# Altium PCB stepper_driver.PcbDoc
Units mm, origin at the board's own origin, x right, y up, seen from the top; angles counter-clockwise.
Board outline 57 x 45 mm, 2 copper layers (Top Layer, Bottom Layer), stack 1.571 mm thick; 62 components, 43 nets, 177 pads, 16 vias.
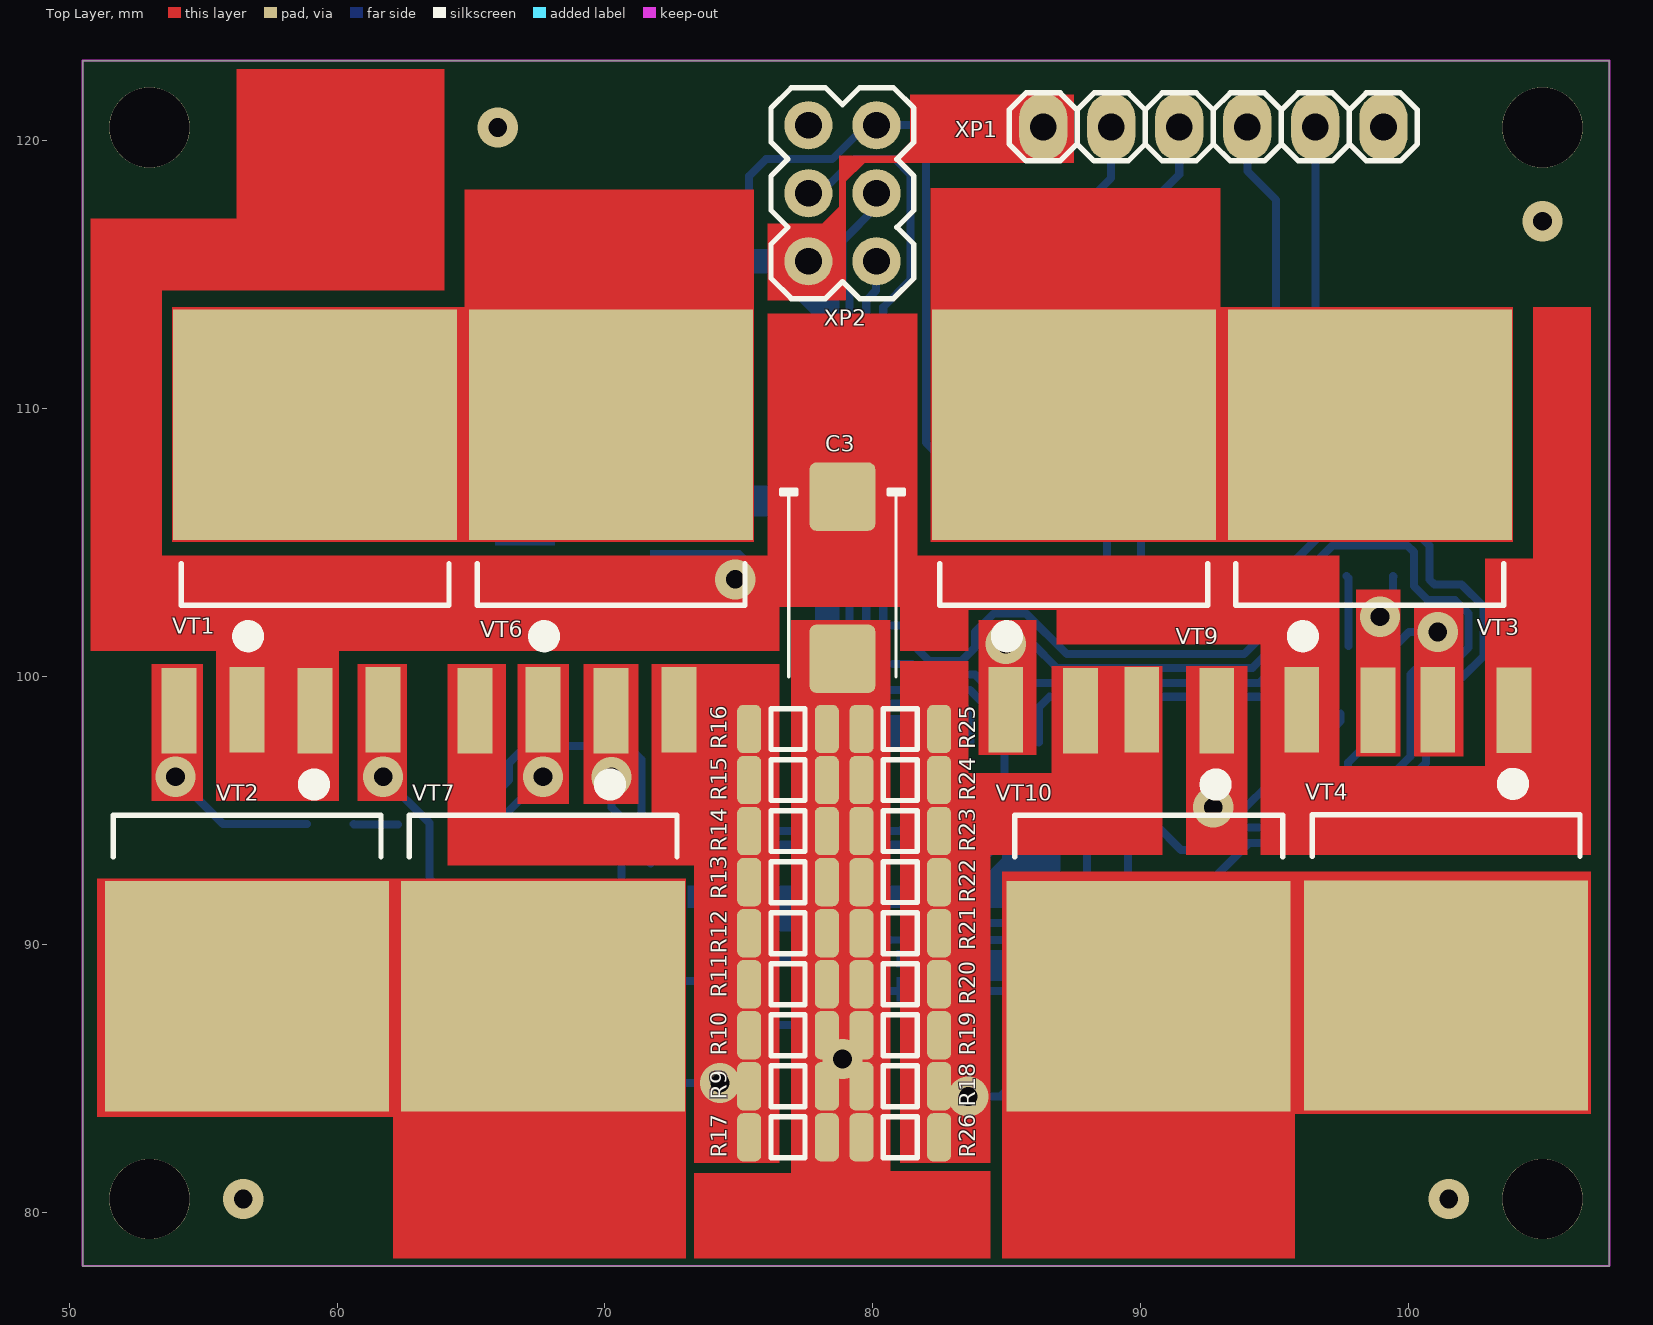
[diagram p0: Top Layer view]
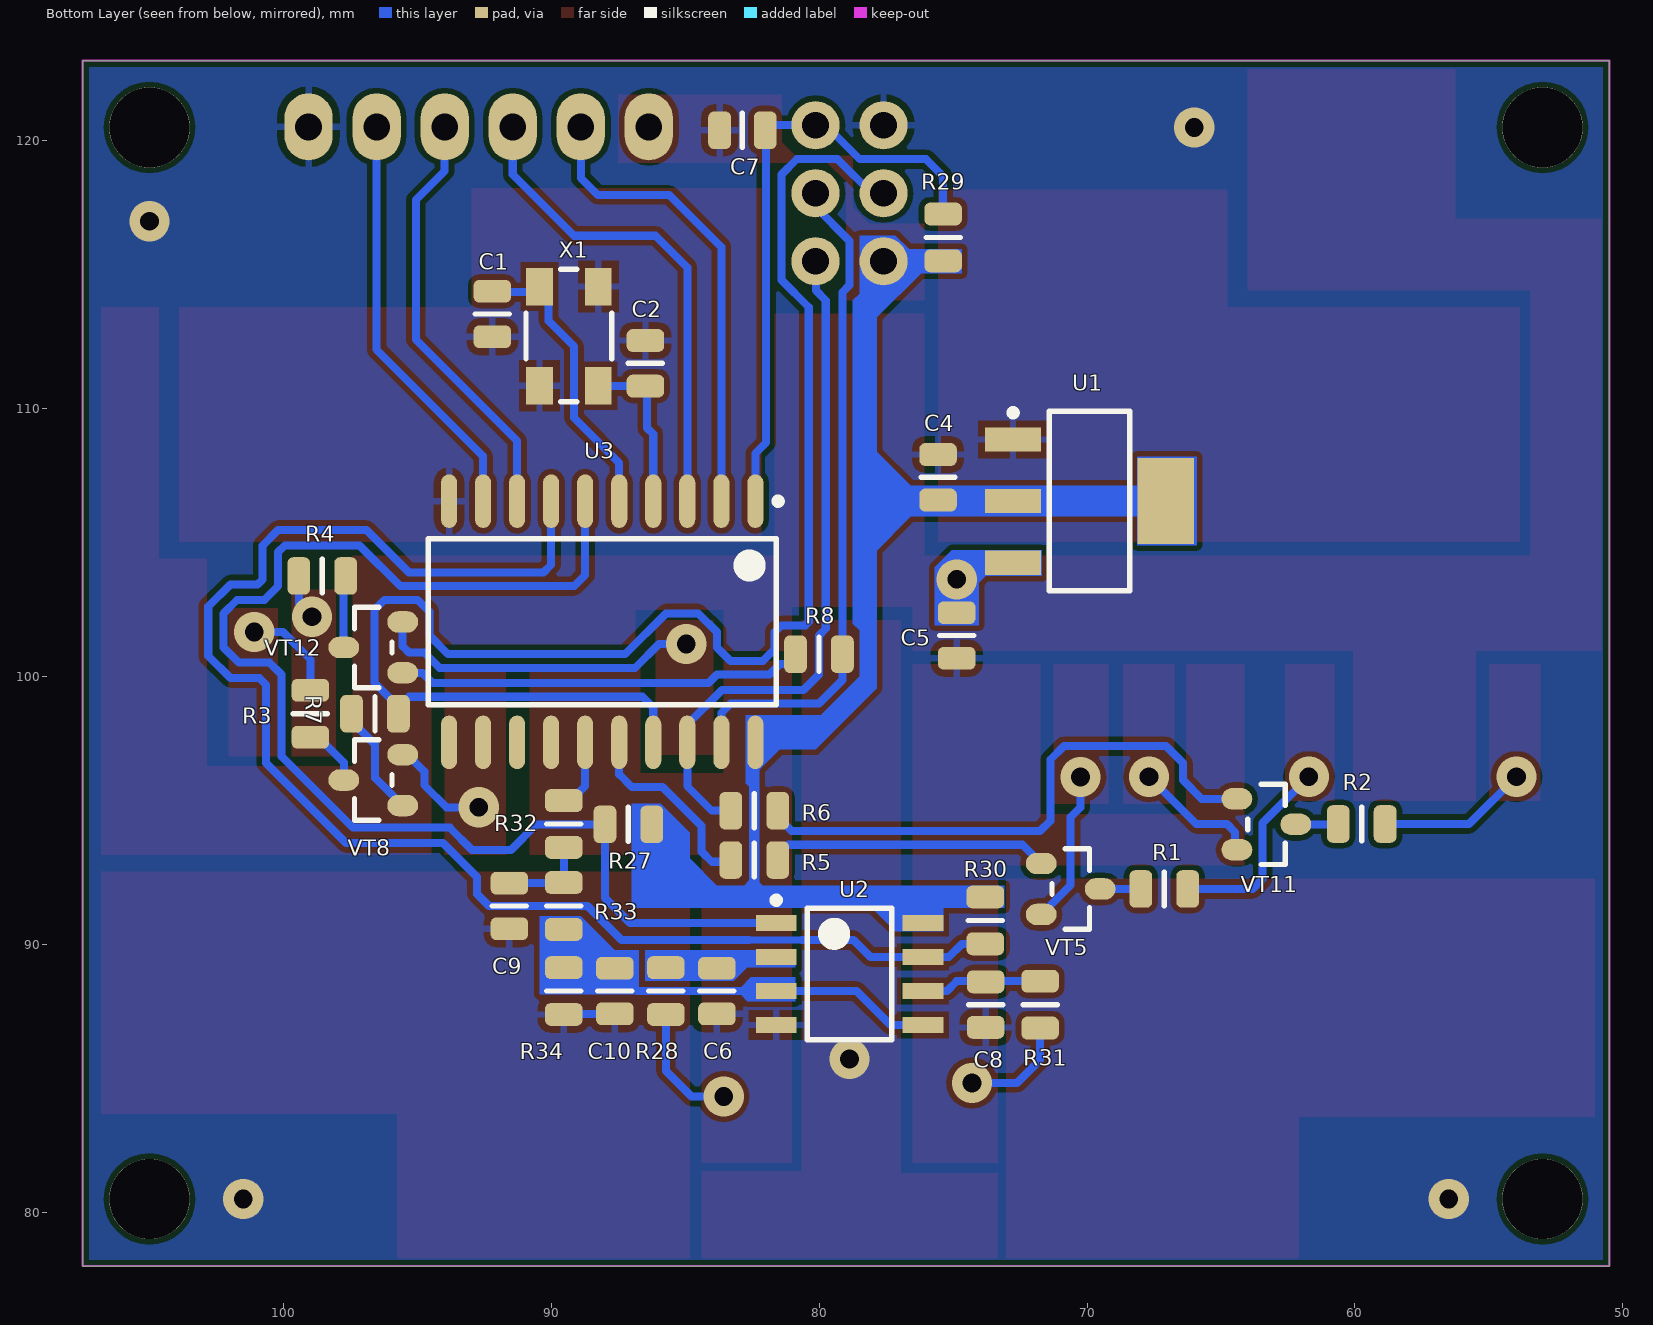
[diagram p1: Bottom Layer view, seen from below]
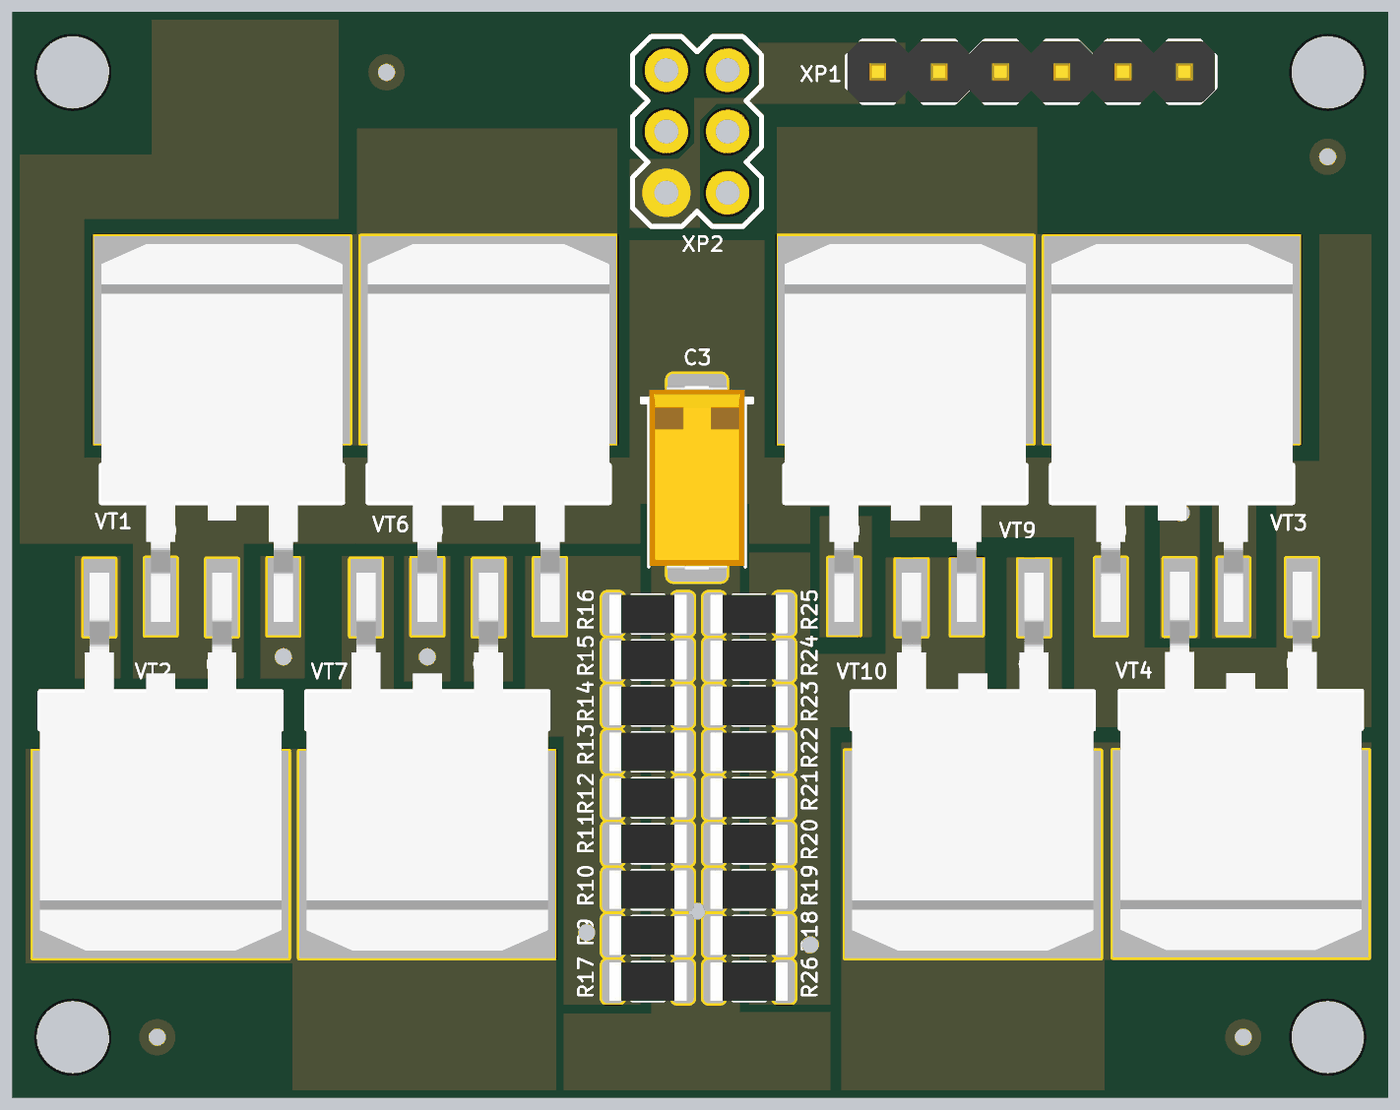
[diagram p2: 3D render of the assembled board from above, using the file's embedded part models]
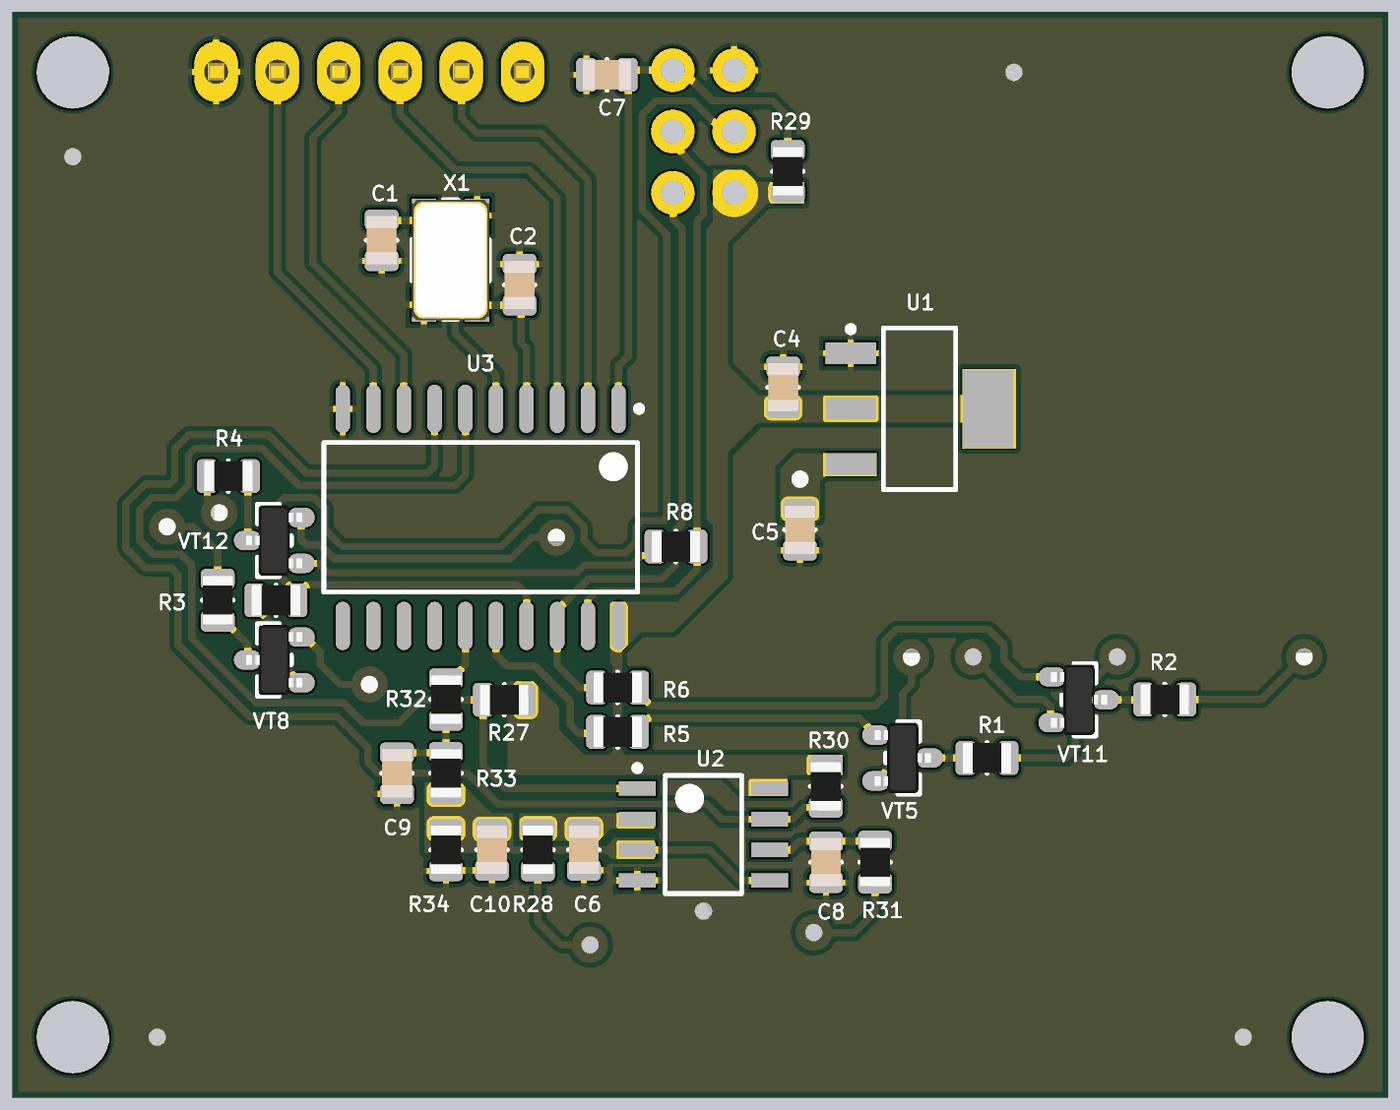
[diagram p3: 3D render of the assembled board from below, using the file's embedded part models]

## Layer stack, top to bottom
Top Solder: solder mask 0.0102, Solder Resist, Dk 3.5
Top Layer: signal copper 0.0356
Dielectric 1: dielectric 1.5, FR-4, Dk 4.8
Bottom Layer: signal copper 0.0356
Bottom Solder: solder mask 0.0102, Solder Resist, Dk 3.5

## Board outline
50.5,78 50.5,123 107.5,123 107.5,78

## Design rules (kind name [scope] priority, off if disabled: settings)
Clearance [All] p1: gap=0.2
PolygonConnect PolygonConnect_1 [IsVia] p1: connectstyle=Direct reliefconductorwidth=0.254 reliefentries=4 polygonreliefangle="90 Angle" airgapwidth=0.254
PolygonConnect [All] p2: connectstyle=Relief reliefconductorwidth=0.254 reliefentries=4 polygonreliefangle="90 Angle" airgapwidth=0.254
RoutingVias [All] p1: holewidth=0.7 width=1.5 viastyle="Through Hole" minholewidth=0.5 minwidth=0.8 maxholewidth=1 maxwidth=2
SolderMaskExpansion [All] p1: expansion=0.102
Width [All] p1: maxlimit=2 minlimit=0.2 preferedwidth=0.254
29 further rules are at their usual default settings.

## Components (designator, comment, footprint, x,y, rotation, side; value= is the part's Value field where it differs from the comment)
C1 "22pF" CAP0805R 92.202,113.538 r90 bottom
C2 "22pF" CAP0805R 86.487,111.697 r270 bottom
C3 "330uF" TAN_D 78.867,103.695 r270 top
C4 "22uF" CAP0805R 75.565,107.442 r270 bottom
C5 "22uF" CAP0805R 74.867,101.536 r90 bottom
C6 "100nF" CAP0805R 83.82,88.265 r90 bottom
C7 "100nF" CAP0805R 82.867,120.396 r180 bottom
C8 "100nF" CAP0805R 73.787,87.757 r90 bottom
C9 "100nF" CAP0805R 91.567,91.44 r90 bottom
C10 "100nF" CAP0805R 87.63,88.265 r90 bottom
R1 "1k" RES0805R 67.12,92.075 r180 bottom
R2 "1k" RES0805R 59.75,94.5 r0 bottom
R3 "1k" RES0805R 98.996,98.615 r90 bottom
R4 "1k" RES0805R 98.552,103.759 r180 bottom
R5 "1k" RES0805R 82.423,93.154 r180 bottom
R6 "1k" RES0805R 82.423,94.996 r0 bottom
R7 "1k" RES0805R 96.584,98.615 r0 bottom
R8 "1k" RES0805R 80.01,100.838 r180 bottom
R9 "1" RES1206R 76.835,84.709 r180 top
R10 "1" RES1206R 76.835,86.614 r180 top
R11 "1" RES1206R 76.835,88.519 r180 top
R12 "1" RES1206R 76.835,90.424 r180 top
R13 "1" RES1206R 76.835,92.329 r180 top
R14 "1" RES1206R 76.835,94.234 r180 top
R15 "1" RES1206R 76.835,96.139 r180 top
R16 "1" RES1206R 76.835,98.044 r180 top
R17 "1" RES1206R 76.835,82.804 r180 top
R18 "1" RES1206R 81.026,84.709 r0 top
R19 "1" RES1206R 81.026,86.614 r0 top
R20 "1" RES1206R 81.026,88.519 r0 top
R21 "1" RES1206R 81.026,90.424 r0 top
R22 "1" RES1206R 81.026,92.329 r0 top
R23 "1" RES1206R 81.026,94.234 r0 top
R24 "1" RES1206R 81.026,96.139 r0 top
R25 "1" RES1206R 81.026,98.044 r0 top
R26 "1" RES1206R 81.026,82.804 r0 top
R27 "4k7" RES0805R 87.122,94.488 r180 bottom
R28 "10k" RES0805R 85.725,88.265 r90 bottom
R29 "10k" RES0805R 75.374,116.395 r90 bottom
R30 "4k7" RES0805R 73.8,90.9 r90 bottom
R31 "10k" RES0805R 71.755,87.757 r90 bottom
R32 "36k" RES0805R 89.535,94.5 r270 bottom
R33 "51k" RES0805R 89.535,91.44 r270 bottom
R34 "10k" RES0805R 89.535,88.265 r90 bottom
U1 "LM1117IMP-5.0" MP04A_L 69.913,106.553 r180 bottom
U2 "LM393DG" ONSC-SOIC-8-751-07_V 78.867,88.9 r180 bottom
U3 "ATtiny2313-20SU" 20S_L 88.1,102.05 r270 bottom
VT1 "KT837A" D2PAK 59.182,105.41 r90 top
VT2 "KT837A" D2PAK 56.642,92.075 r270 top
VT3 "KT837A" D2PAK 98.552,105.41 r90 top
VT4 "KT837A" D2PAK 101.4,92.1 r270 top
VT5 "BC847C" SOT23 70.612,92.075 r180 bottom
VT6 "KT829A" D2PAK 70.231,105.41 r90 top
VT7 "KT829A" D2PAK 67.691,92.075 r270 top
VT8 "BC847C" SOT23 96.647,96.139 r0 bottom
VT9 "KT829A" D2PAK 87.503,105.41 r90 top
VT10 "KT829A" D2PAK 90.297,92.075 r270 top
VT11 "BC847C" SOT23 63.309,94.488 r180 bottom
VT12 "BC847C" SOT23 96.647,101.092 r0 bottom
X1 "10MHz" 5032 89.344,112.712 r270 bottom
XP1 "PLS" PLS-06 92.71,120.523 r0 top
XP2 "PLD" PLD-06 78.867,118.046 r90 top

## Footprints (in the part's own frame and the unit in brackets; to place one, negate y for a bottom-side part, rotate by r counter-clockwise, add the part's x,y. Pads: shape width x height; smd on the part's side, far side on the other; paste and mask are expansions set on the pad)
20S_L [mm] "SOIC, 20-Leads, Body 12.8x7.5mm, Pitch 1.27mm, IPC High Density"
  oval 2x0.6 smd: 1(-4.5,5.715) 2(-4.5,4.445) 3(-4.5,3.175) 4(-4.5,1.905) 5(-4.5,0.635) 6(-4.5,-0.635) 7(-4.5,-1.905) 8(-4.5,-3.175) 9(-4.5,-4.445) 10(-4.5,-5.715) 11(4.5,-5.715) 12(4.5,-4.445) 13(4.5,-3.175) 14(4.5,-1.905) 15(4.5,-0.635) 16(4.5,0.635) 17(4.5,1.905) 18(4.5,3.175) 19(4.5,4.445) 20(4.5,5.715)
  silkscreen extent -4.62,-6.5 3.1,6.69, body extent -3.8,-6.5 3.8,6.5, height 2.65
5032 [mm]
  rect 1.4x1 smd: 1(-1.85,-1.1) 2(1.85,-1.1) 3(1.85,1.1) 4(-1.85,1.1)
  silkscreen extent -2.5,-1.6 2.45,1.6, body extent -2.5,-1.6 2.5,1.6, height 1.01
CAP0805R [mm] "capacitor 0805 reflow soldering"
  rrect50% 0.85x1.4 smd: 1(-0.85,0) 2(0.85,0)
  silkscreen extent 0,-0.64 0,0.64, body extent -1,-0.62 1,0.63, height 0.61
D2PAK [mm] "D2-PAK, 4-Leads, Body 8.8x10.4mm, Pitch 2.54mm, Lead Span 15.1mm, IPC High Density"
  rect 3.2x1.3 smd: 1(-6.65,2.54) 2(-6.65,-2.54)
  rect 8.6x10.6 smd: 3(4,0)
  silkscreen extent -4.2,-5 -1.2,5, body extent -7.69,-5 7.98,5, height 4.81
MP04A_L [mm] "SOT223, 4-Leads, Body 6.5x3.5mm, Pitch 2.3mm, Lead Span 7mm, IPC High Density"
  rect 2.1x0.9 smd: 1(-2.85,2.3) 2(-2.85,0) 3(-2.85,-2.3)
  rect 2.1x3.2 smd: 4(2.85,0)
  silkscreen extent -2.98,-3.35 1.5,3.42, body extent -1.86,-3.35 1.86,3.35, height 1.8
ONSC-SOIC-8-751-07_V [mm] "SOIC, 8-Leads, Body 4.9x3.9mm, Pitch 1.27mm"
  rect 1.52x0.6 smd: 1(-2.74,1.905) 2(-2.74,0.635) 3(-2.74,-0.635) 4(-2.74,-1.905) 5(2.74,-1.905) 6(2.74,-0.635) 7(2.74,0.635) 8(2.74,1.905)
  silkscreen extent -2.87,-2.45 1.58,2.88, body extent -1.95,-2.45 1.95,2.45, height 1.75
PLD-06 [mm]
  round 1.8 hole 1: 1(-2.54,-1.27) 2(-2.54,1.27) 3(0,-1.27) 4(0,1.27) 5(2.54,-1.27) 6(2.54,1.27)
  silkscreen extent -3.94,-2.67 3.94,2.67
PLS-06 [mm]
  oval 1.8x2.5 hole 1: 1(-6.35,0) 2(-3.81,0) 3(-1.27,0) 4(1.27,0) 5(3.81,0) 6(6.35,0)
  silkscreen extent -7.62,-1.27 7.62,1.27, body extent -7.62,-1.27 7.62,1.27, height 8.45
RES0805R [mm] "resistor 0805 reflow soldering"
  rrect50% 0.85x1.4 smd: 1(-0.875,0) 2(0.875,0)
  silkscreen extent 0,-0.64 0,0.64, body extent -1,-0.62 1,0.63, height 0.61
RES1206R [mm] "resistor 1206 reflow soldering"
  rrect50% 0.9x1.8 smd: 1(-1.45,0) 2(1.45,0)
  silkscreen extent -0.64,-0.76 0.63,0.76, body extent -1.6,-0.8 1.6,0.8, height 0.61
SOT23 [mm]
  oval 1.15x0.8 smd mask+0.1: 1(-1.1,0.95) 2(-1.1,-0.95) 3(1.1,0)
  silkscreen extent -0.7,-1.5 0.7,1.5, body extent -1.16,-1.46 1.18,1.46, height 1
TAN_D [mm] "Molded body capacitor, Body 7.3x4.3mm, 2917, IPC Nominal settings"
  round 1 on Mech15: 0(0,0)
  rrect20% 2.55x2.45 smd: 1(-3.025,0) 2(3.025,0)
  silkscreen extent -3.3,-2.3 3.7,2.3, body extent -3.8,-1.97 3.8,1.98, height 3.1

## Part data
C1 C2: library part CC0805_22PF_50V_5%_NP0, "SMD 0805 Capacitor"
C3: library part T495D337M010AHE100
C4 C5: library part CC0805_22UF_16V_10%_X5R, "SMD 0805 Capacitor"
C6 C7 C8 C9 C10: library part CC0805_100NF_50V_10%_X7R, "SMD 0805 Capacitor"
R1 R2 R3 R4 R5 R6 R7 R8: library part R0805_1K_1%_0.125W_100PPM
R9 R10 R11 R12 R13 R14 R15 R16 R17 R18 R19 R20 R21 R22 R23 R24 R25 R26: library part R1206_1R_1%_0.25W_200PPM
R27 R30: library part R0805_4K7_1%_0.125W_100PPM
R28 R29 R31 R34: library part R0805_10K_1%_0.125W_100PPM
R32: library part R0805_36K_1%_0.125W_100PPM
R33: library part R0805_51K_1%_0.125W_100PPM
U1: library part CMP-0062-01629-3, "800mA Low-Dropout Linear Regulator, 4-pin SOT-223"
U2: library part CMP-1305-00047-1, "Low Offset Voltage Dual Comparators, 2 to 36 V, 0 to 70 degC, 8-Pin SOIC, Pb-Free, Tube"
U3: library part CMP-0093-00143-2, "Low Power tinyAVRA® 8-Bit Microcontroller, 2.7-5.5V, 20MHz, 2K Flash Memory, Industrial Grade (-40A°C to 85A°C), 20-Lead SOIC, Pb-Free"
X1: library part "KX-9AT 10.0 MHz 30/50/50 16 pF", "3*2.5 mm SMD Crystall"
XP1: library part PLS-06
XP2: library part PLD-06

## Free pads (board coordinates)
  round 3 hole 3 unplated: 0(105,120.5) 1(53,120.5) 2(105,80.5) 3(53,80.5)

## Via types
v1: diameter 1.5, hole 0.7, Top Layer to Bottom Layer, tented both sides, 16 vias

## Nets (pads, with @x,y where several pads share a name; then routed paths per layer and width w, separated by ;. In a path a pad name is that pad's centre, name@x,y a point inside that pad or via, vN(x,y) a via of type N, cw(c..) or ccw(c..) an arc to the next point about the centre after c; other vN are vias at no path point)
COMPA: R30.1 U2.7 U3.7 | length 55
  Bottom Layer w0.25: 80.645,90.17 82.614,90.17
  Bottom Layer w0.3: R30.1 74.675,90.025 75.165,89.535 78.085,89.535 78.72,90.17 80.645,90.17 ; 82.614,90.17 87.376,90.17 88.646,91.44 92.329,91.44 92.773,91.885 92.773,92.519 94.043,93.789 97.663,93.789 100.647,96.774 100.647,99.695 100.901,99.949 101.981,99.949 102.806,100.774 102.806,102.616 101.981,103.441 100.965,103.441 100.774,103.632 100.774,104.902 100.203,105.474 96.901,105.474 95.313,103.886 90.297,103.886 90.005,104.178 U3.7@90.005,105.918
COMPB: R27.1 U2.1 U3.6 | length 49.1
  Bottom Layer w0.3: U2.1@81.734,90.805 87.058,90.805 87.997,91.743 R27.1 90.551,94.488 91.504,93.535 92.964,93.535 93.789,94.361 97.409,94.361 100.076,97.028 100.076,100.076 100.52,100.52 101.663,100.52 102.235,101.092 102.235,102.362 101.727,102.87 100.711,102.87 100.203,103.378 100.203,104.648 99.949,104.902 97.155,104.902 95.631,103.378 89.154,103.378 88.735,103.797 U3.6
DIR: U3.9 XP1.5 | length 15.6
  Bottom Layer w0.3: U3.9 92.545,108.229 96.52,112.204 XP1.5
GND: C1.1 C2.1 C3.2 C4.1 C5.1 C6.1 C7.1 C8.1 C9.1 C10.1 R9.1 R10.1 R11.1 R12.1 R13.1 R14.1 R15.1 R16.1 R17.1 R18.1 R19.1 R20.1 R21.1 R22.1 R23.1 R24.1 R25.1 R26.1 R34.1 U1.1 U2.4 U3.10 X1.2 X1.4 XP1.6 XP2.6 | length 2.3
  Bottom Layer w0.3: U2.4@81.734,86.995 U2.4@82.169,86.995 ; C10.1 R34.1@89.535,87.415
  other v1: 56.5,80.5 101.5,80.5 78.867,85.725 105,117 66,120.5
NetC6_2: C6.2 R28.2 U2.2 | length 0.4
  Bottom Layer w0.3: U2.2@81.734,89.535 U2.2@82.169,89.535
NetC8_2: C8.2 R31.2 U2.6 | length 4.7
  Bottom Layer w0.3: R31.2 74.868,88.632 75.235,88.265 U2.6@76.254,88.265
NetC9_2: C9.2 R32.2 R33.1 | length 3.4
  Bottom Layer w0.3: R32.2 R33.1 89.56,92.29 C9.2
NetR1_1: R1.1 VT5.3 | length 1.4
  Bottom Layer w0.3: R1.1@68.121,92.075 VT5.3
NetR1_2: R1.2 VT1.2 | length 7.6
  Bottom Layer w0.3: v1(61.722,96.266) 63.45,94.538 63.45,92.442 63.817,92.075 R1.2@66.372,92.075
NetR2_1: R2.1 VT2.2 | length 8.1
  Top Layer w0.3: v1(53.975,96.266) VT2.2@53.975,98.725
  Bottom Layer w0.3: v1(53.975,96.266) 55.741,94.5 R2.1
NetR2_2: R2.2 VT11.3 | length 1.7
  Bottom Layer w0.3: R2.2 60.637,94.488 VT11.3@62.273,94.488
NetR3_1: R3.1 VT8.3 | length 2.3
  Bottom Layer w0.3: VT8.3 97.747,96.794 98.693,97.741 R3.1
NetR3_2: R3.2 VT3.2 | length 3.7
  Bottom Layer w0.3: R3.2 98.996,100.647 100.013,101.663 v1(101.092,101.663)
NetR4_1: R4.1 VT4.2 | length 1.7
  Bottom Layer w0.3: v1(98.933,102.235) 99.427,102.729 R4.1 R4.1@99.441,103.745
NetR4_2: R4.2 VT12.3 | length 2.6
  Bottom Layer w0.3: R4.2 97.75,103.686 VT12.3@97.75,101.15
NetR5_2: R5.2 VT5.1 | length 10.5
  Bottom Layer w0.3: VT5.1 72.413,93.726 81.153,93.726 81.548,93.331 R5.2@81.548,93.091
NetR6_1: R6.1 VT11.1 | length 21.4
  Bottom Layer w0.3: VT11.1@64.473,95.438 65.72,95.438 66.421,96.139 66.421,96.774 67.056,97.409 70.866,97.409 71.374,96.901 71.374,94.615 71.755,94.234 81.026,94.234 81.548,94.756 R6.1
NetR7_2: R7.2 VT8.1 | length 4.2
  Bottom Layer w0.3: VT8.1 96.584,96.225 96.584,97.472 97.458,98.347 R7.2
NetR8_1: R8.1 VT12.1 | length 15.2
  Bottom Layer w0.3: R8.1@80.758,100.471 81.456,100.471 81.852,100.076 83.82,100.076 84.138,99.758 94.424,99.758 94.808,100.142 VT12.1 ; VT12.1@95.547,100.2 VT12.1@95.55,100.2
NetVT5_2: VT5.2 VT7.1 | length 8.2
  Top Layer w0.3: VT7.1 70.231,96.269 v1(70.25,96.25)
  Bottom Layer w0.3: v1(70.25,96.25) 70.25,95.123 70.612,94.761 70.612,92.225 VT5.2
NetVT6_1: VT6.1 VT11.2 | length 7.2
  Top Layer w0.3: v1(67.691,96.266) VT6.1
  Bottom Layer w0.3: VT11.2@64.473,93.538 64.473,94.191 64.782,94.5 65.925,94.5 v1(67.691,96.266)
NetVT8_2: VT8.2 VT10.1 | length 3.9
  Bottom Layer w0.3: v1(92.71,95.123) 93.916,95.123 94.742,95.948 94.742,96.456 95.375,97.089 VT8.2
NetVT9_1: VT9.1 VT12.2 | length 12.3
  Bottom Layer w0.3: v1(84.963,101.219) 85.979,101.219 86.868,100.33 94.17,100.33 94.742,100.901 95.313,100.901 95.547,101.135 VT12.2 ; VT12.2@95.55,102.042 VT12.2@95.55,102.1
OUT1: R5.1 U3.16 | length 7.3
  Bottom Layer w0.3: R5.1@83.298,93.091 84.01,93.091 84.391,93.472 84.391,94.424 85.852,95.885 86.995,95.885 87.465,96.355 U3.16
OUT2: R7.1 U3.17 XP2.4 | length 57.2
  Bottom Layer w0.3: XP2.4 78.041,118.046 79.311,119.316 80.835,119.316 81.407,118.745 81.407,114.808 80.391,113.792 80.391,102.044 80.518,101.917 81.407,101.917 81.661,101.663 81.661,101.028 82.105,100.584 83.312,100.584 83.82,101.092 83.82,101.663 84.519,102.362 85.725,102.362 87.249,100.838 93.853,100.838 94.551,101.536 94.551,102.425 94.996,102.87 96.23,102.87 96.6,102.5 96.6,99.775 95.694,98.87 95.313,99.251 86.595,99.251 86.195,98.85 U3.17
OUT3: R6.2 U3.18 XP2.1 | length 25.7
  Bottom Layer w0.3: XP2.1 80.12,115.489 80.12,114.41 79.756,114.046 79.756,101.79 80.01,101.536 80.01,100.076 80.581,99.504 83.629,99.504 84.925,98.209 U3.18 84.925,95.91 84.01,94.996 R6.2
OUT4: R8.2 U3.19 XP2.3 | length 24.9
  Bottom Layer w0.3: XP2.3 80.137,117.538 78.867,116.268 78.867,114.617 79.135,114.349 R8.2 79.135,99.871 80.01,98.996 83.304,98.996 83.655,98.645 U3.19
PHA1: VT1.3 VT6.3
PHA2: VT2.3 VT7.3
PHB1: VT3.3 VT9.3
PHB2: VT4.3 VT10.3 | length 0
  Top Layer w0.3: VT4.3@101.375,88.075 VT4.3
PWM1: R32.1 U3.15 | length 2.7
  Bottom Layer w0.3: U3.15 88.735,95.923 89.283,95.375 R32.1
RST: C7.2 R29.2 U3.1 XP2.5 | length 23
  Bottom Layer w0.3: R29.2@75.374,117.207 75.374,118.681 76.01,119.316 78.486,119.316 79.756,120.587 XP2.5 C7.2@82.233,120.587 ; C7.2@81.954,120.269 81.978,120.245 81.978,108.737 82.385,108.331 U3.1
RXD: U3.2 XP1.2 | length 17.7
  Bottom Layer w0.3: U3.2 83.655,116.04 85.598,117.983 88.265,117.983 88.9,118.618 XP1.2
SENSA: R9.2 R10.2 R11.2 R12.2 R13.2 R14.2 R15.2 R16.2 R17.2 R31.1 VT6.2 VT7.2 | length 22.4
  Top Layer w0.3: VT7.2 65.151,94.799 65.95,94 71.95,94 72.946,94.996 ; VT6.2 72.771,95.171 72.946,94.996 ; R14.2@75.004,94.996 72.946,94.996
  Bottom Layer w0.3: R31.1 71.755,85.695 72.614,84.836 v1(74.295,84.836)
SENSB: R18.2 R19.2 R20.2 R21.2 R22.2 R23.2 R24.2 R25.2 R26.2 R28.1 VT9.2 VT10.2 | length 7.1
  Top Layer w0.3: R23.2@82.284,94.896 R23.2@82.384,94.996 ; VT10.2 90.008,98.725 VT9.2
  Bottom Layer w0.3: v1(83.566,84.328) 84.772,84.328 85.725,85.281 R28.1
STEP: U3.8 XP1.4 | length 16
  Bottom Layer w0.3: U3.8 91.275,108.801 95.059,112.585 95.059,117.792 93.98,118.872 XP1.4
TXD: U3.3 XP1.3 | length 18.5
  Bottom Layer w0.3: U3.3 84.925,115.278 86.106,116.459 89.154,116.459 91.44,118.745 XP1.3
V_REF: C10.2 R33.2 R34.2 U2.3 U2.5 | length 15.6
  Bottom Layer w0.3: U2.5@76.254,86.995 77.343,86.995 78.613,88.265 81.734,88.265 86.78,88.265 C10.2 87.655,89.14 R34.2 R33.2
VCC: C3.1 C5.2 U1.3 VT1.1 VT2.1 VT3.1 VT4.1 | length 35.7
  Top Layer w0.3: VT1.1@56.515,98.76 56.515,102.215 58.1,103.8 61.15,103.8 59.055,101.705 VT2.1@59.055,98.725 ; 94.55,103.8 96.139,102.211 96.139,98.76 96.139,95.411 97.05,94.5 103.2,94.5 103.94,95.24 VT4.1
  other v1: 74.867,103.632
VDD: C4.2 R27.2 R29.1 R30.2 U1.2 U1.4 U2.8 U3.20 XP1.1 XP2.2 | length 8.7
  Bottom Layer w0.3: R30.2 75.925,91.775 76.254,91.446 U2.8@76.254,90.805 ; R27.2@86.247,94.248 R27.2
  Bottom Layer w0.5: R29.1@75.374,115.457 75.424,115.506 XP2.2 77.58,115.489 77.58,114.046 78.105,113.521 ; U3.20@82.296,98.298 82.385,98.209 U3.20
XT1: C1.2 U3.5 X1.1 | length 10.9
  Bottom Layer w0.3: U3.5 87.465,107.975 89.154,109.664 89.154,112.331 90.106,113.284 90.106,114.145 X1.1@90.318,114.356 ; X1.1@90.318,114.435 X1.1@90.318,114.356 ; C1.2@92.148,114.356 X1.1@90.318,114.356
XT2: C2.2 U3.4 X1.3 | length 5.8
  Bottom Layer w0.3: U3.4 86.195,109.055 86.423,109.283 86.423,110.847 X1.3@87.879,110.847
pads on no net: C3.0 U3.11 U3.12 U3.13 U3.14

## Polygon pours and split planes (outlines as drawn)
GND on Bottom Layer "Top Layer-No Net" (solid, remove dead copper, pour order 2): 107.5,123 107.5,78 50.5,78 50.5,123

## Keep-outs
Keep-Out Layer:
  the board outline again, w0.075

## Other copper
Top Layer:
  region net VDD: 87.503,121.73 81.407,121.73 81.407,119.951 80.899,119.444 78.74,119.444 78.74,117.538 78.105,116.903 76.073,116.903 76.073,114.046 78.994,114.046 78.994,118.491 79.692,119.189 87.503,119.189
  region net SENSB: 84.391,81.852 84.391,93.345 90.805,93.345 90.805,100.393 86.677,100.393 86.677,96.393 83.566,96.393 83.566,100.584 81.026,100.584 81.026,81.852
  region net SENSA: 76.517,100.457 76.517,81.852 73.343,81.852 73.343,92.964 64.135,92.964 64.135,100.457 66.294,100.457 66.294,94.869 71.755,94.869 71.755,100.457
  region net GND: 76.962,102.108 80.645,102.108 80.645,81.534 84.391,81.534 84.391,78.295 73.343,78.295 73.343,81.471 76.962,81.471
  region net NetVT6_1: 66.739,100.457 66.739,95.25 68.644,95.25 68.644,100.457
  region net NetVT5_2: 69.215,100.457 69.215,95.25 71.247,95.25 71.247,100.457
  region net NetVT8_2: 91.694,100.393 91.694,93.345 93.98,93.345 93.98,100.393
  region net VCC: 94.488,93.345 106.807,93.345 106.807,113.792 104.648,113.792 104.648,104.394 102.87,104.394 102.87,96.647 97.409,96.647 97.409,104.521 81.661,104.521 81.661,113.538 76.073,113.538 76.073,104.521 53.467,104.521 53.467,114.427 64.008,114.427 64.008,122.682 56.261,122.682 56.261,117.094 50.8,117.094 50.8,100.965 55.499,100.965 55.499,95.377 60.071,95.377 60.071,100.965 76.517,100.965 76.517,102.616 81.026,102.616 81.026,100.965 83.566,100.965 83.566,102.489 86.868,102.489 86.868,101.219 94.488,101.219
  region net NetVT9_1: 83.947,102.108 83.947,97.091 86.106,97.091 86.106,102.108
  region net NetR4_1: 98.044,97.028 99.695,97.028 99.695,103.251 98.044,103.251
  region net NetR3_2: 100.203,102.552 100.203,97.028 102.044,97.028 102.044,102.552
  region net NetR1_2: 62.611,100.457 62.611,95.377 60.77,95.377 60.77,100.457
  region net NetR2_1: 54.991,95.377 53.086,95.377 53.086,100.457 54.991,100.457
  region net PHA2: 73.025,92.456 51.054,92.456 51.054,83.566 62.103,83.566 62.103,78.295 73.025,78.295
  region net PHB2: 84.836,92.71 84.836,78.295 95.758,78.295 95.758,83.693 106.807,83.693 106.807,92.71
  region net PHA1: 53.848,105.029 75.565,105.029 75.565,118.173 64.77,118.173 64.77,113.792 53.848,113.792
  region net PHB1: 103.886,105.029 82.169,105.029 82.169,118.237 92.964,118.237 92.964,113.792 103.886,113.792
Bottom Layer:
  region net VDD: 78.486,116.459 78.486,114.3 78.74,114.046 78.74,101.981 78.486,101.727 78.486,100.013 79.947,98.552 82.74,98.552 82.74,96.012 82.614,95.885 82.614,92.392 82.804,92.202 83.82,92.202 84.836,93.218 84.836,94.17 85.915,95.25 86.995,95.25 86.995,91.376 78.041,91.376 77.153,90.487 75.374,90.487 75.374,91.376 73.088,91.376 73.088,92.202 82.105,92.202 82.233,92.329 82.233,96.52 81.471,97.282 80.137,97.282 77.851,99.568 77.851,113.411 76.2,115.062 74.676,115.062 74.676,115.951 76.644,115.951 77.153,116.459
  region net VDD: 76.581,107.124 77.915,108.458 77.915,104.648 76.581,105.981 68.135,105.981 68.135,104.902 65.913,104.902 65.913,108.204 68.135,108.204 68.135,107.124
  region net VCC: 71.691,104.712 75.057,104.712 75.692,104.076 75.692,101.917 74.041,101.917 74.041,103.505 73.787,103.759 71.691,103.759
  region net NetC6_2: 80.899,89.789 86.487,89.789 86.487,88.646 83.185,88.646 82.677,89.154 80.899,89.154
  region net V_REF: 80.899,88.773 82.55,88.773 82.931,88.392 86.741,88.392 86.741,89.789 87.63,89.789 88.9,91.059 90.424,91.059 90.424,88.138 82.931,88.138 82.677,87.884 80.899,87.884